# Altium PCB ThreadModule.PcbDoc (part 2 of 2)
Units mm, origin at the board's own origin, x right, y up, seen from the top; angles counter-clockwise.
Board outline 40 x 67.5 mm, 4 copper layers (SIG1, PLANE1, SIG3, SIG4), stack 1.58 mm thick; 114 components, 89 nets, 388 pads, 426 vias.
Unrouted connection lines stored in the file: 2.
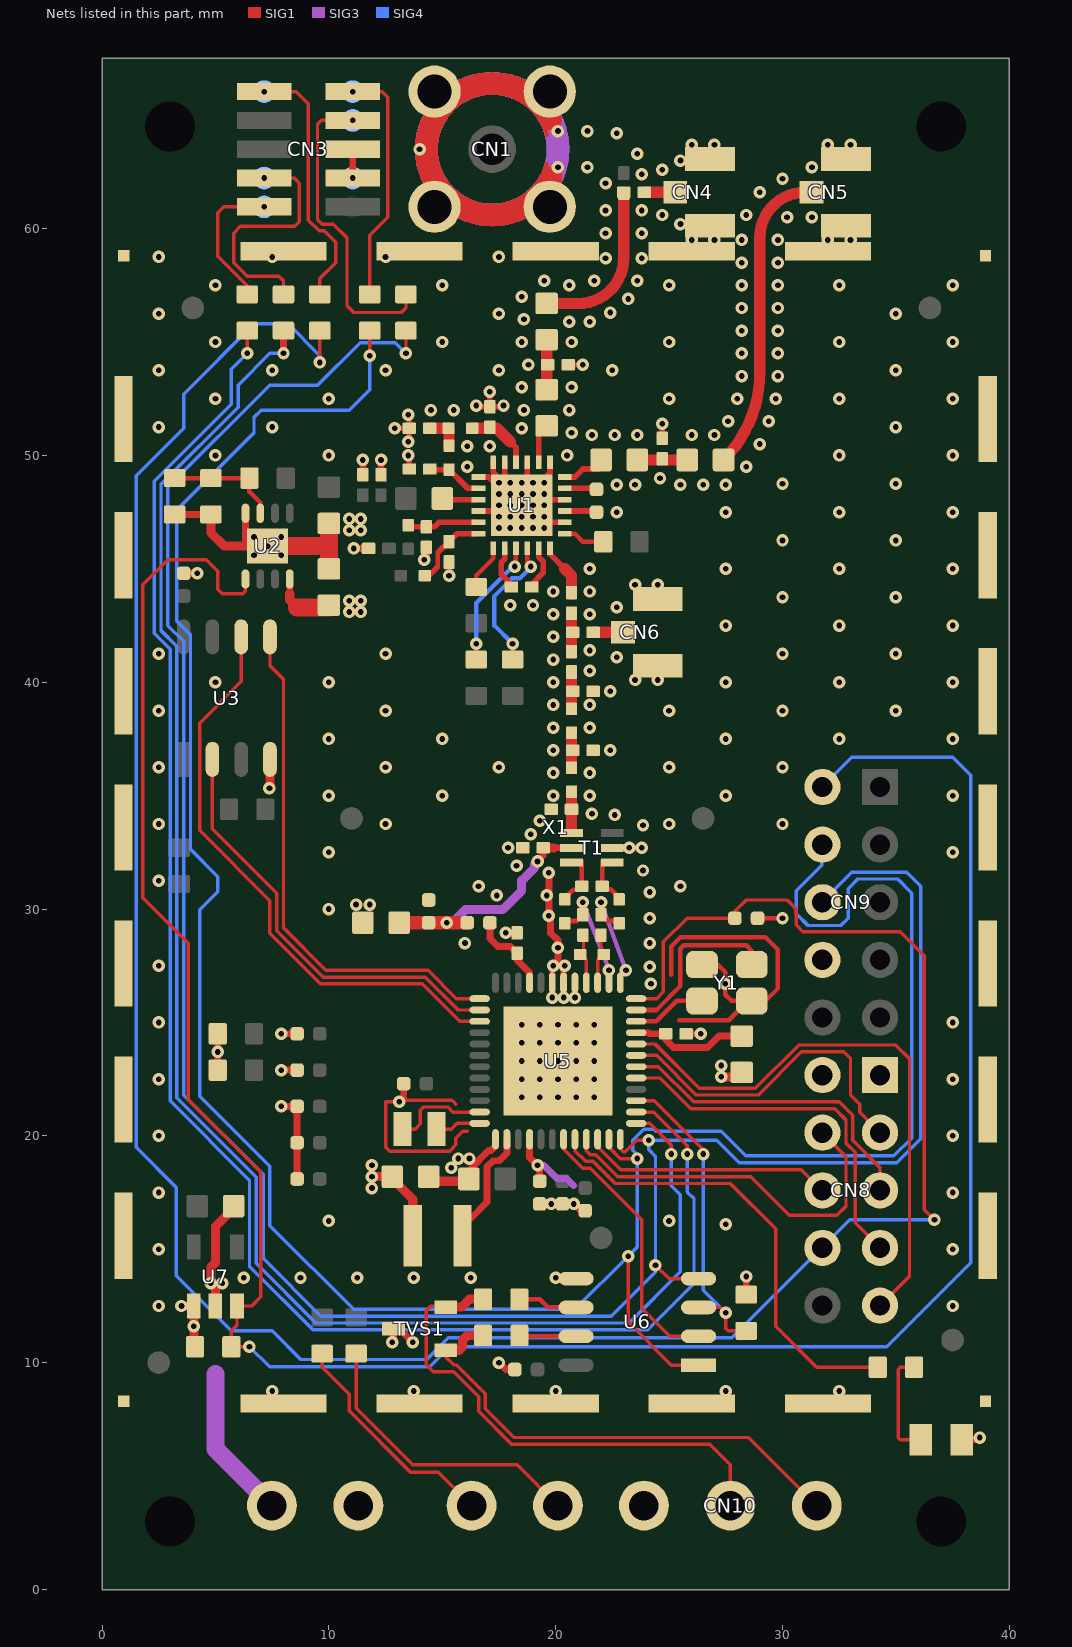
[diagram p4: the nets of this part, all layers, seen from the top]

## Via types
v1: diameter 0.55, hole 0.25, SIG1 to SIG4, 426 vias

## Nets (pads, with @x,y where several pads share a name; then routed paths per layer and width w, separated by ;. In a path a pad name is that pad's centre, name@x,y a point inside that pad or via, vN(x,y) a via of type N, cw(c..) or ccw(c..) an arc to the next point about the centre after c; other vN are vias at no path point) (continued)
GND: C3.1 C4.2 C5.2 C6.1 C7.2 C8.1 C9.1 C10.2 C11.1 C12.1 C13.2 C14.1 C15.2 C20.2 C21.2 C23.2 C24.1 C25.1 C27.1 C31.1 C33.1 C34.1 C35.1 C36.2 C37.1 C38.1 C39.2 C40.1 C42.1 C43.2 C44.2 C45.2 C46.2 C47.2 CN1.1 CN1.2 CN1.3 CN1.4 CN2.2L CN3.3 CN3.5 CN4.2 CN4.3 CN5.2 CN5.3 CN6.2 CN6.3 CN8.1 CN9.8 CN10.1L LED1.2 R2.1 R11.2 R13.2 R14.1 R21.1 T1.5 TP7.1 TVS1.3 U1.0 U1.8 U1.10 U1.13 U1.15 U1.17 U1.18 U1.19 U1.22 U2.0 U2.4 U3.4 U5.0 U5.17 U5.18 U5.19 U5.37 U6.5 U7.2 X1.1 Y1.2 Y1.4 | length 155.2
  SIG1 w0.15: 15.6,21.4 15.5,21.5 15.425,21.575 13.175,21.575 13.075,21.575 13,21.5 12.5,21.5 12.5,19.5 12.675,19.325 15.325,19.325 15.6,19.6 15.6,19.9 15.9,20.2 16.1,20.2
  SIG1 w0.2: 19.615,62.853 cw(c17.2,63.5) 19.615,64.147 ; 25.1,27.107 25.1,28.349 25.501,28.75 29.25,28.75 29.8,28.2 29.8,26.5 29.25,25.95 Y1.2@28.65,25.95 Y1.2@28.477,25.95 ; 25.45,25.1 27.627,25.1 Y1.2@28.477,25.95 ; Y1.4@26.45,27.55 27.15,27.55 27.477,27.223 v1(27.477,26.7) 27.477,26.223 27.75,25.95 Y1.2@28.477,25.95 ; C27.1@28.9,29.6 v1(30,29.6)
  SIG1 w0.25: v1(12.9,51.2) C5.2@13.55,51.2 ; v1(13.5,50) 13.55,49.95 C7.2@13.55,49.4 ; v1(13.5,50.6) 13.55,50.65 C5.2@13.55,51.2 ; v1(13.5,51.8) 13.55,51.75 C5.2@13.55,51.2 ; v1(16.5,52.2) 16.55,52.15 C4.2@17.1,52.15 ; U1.22@16.55,47.55 U1.0@17.4,47.55 ; U1.19@16.55,49.05 17.05,49.05 U1.0@17.2,48.9 ; v1(17.1,52.8) C4.2@17.1,52.15 ; U1.18@17.25,49.75 17.25,49.25 U1.0@17.4,49.1 ; v1(17.7,52.2) 17.65,52.15 C4.2@17.1,52.15 ; U1.0@17.75,48.9 U1.17@17.75,49.75 ; U1.0@18.75,48.9 U1.15@18.75,49.75 ; U1.0@19.6,47.05 U1.8@20.45,47.05 ; U1.0@19.6,48.05 U1.10@20.45,48.05 ; U1.0@19.6,49.1 19.75,49.25 U1.13@19.75,49.75 ; v1@19.848,26.248 U5.19@19.848,26.75 ; v1@20.348,26.148 U5.18@20.348,26.75 ; C3.1@20.55,54 v1(21.2,54) ; v1@20.848,26.177 U5.17@20.848,26.75 ; C6.1@24.7,50.75 v1(24.7,51.4)
  SIG1 w0.254: U5.19@19.85,26.75 19.85,27.4 v1@19.95,27.5 ; U5.18@20.35,26.75 v1@20.35,27.35
  SIG1 w0.3: R14.1@3.2,47.4 R2.1@4.8,47.4 ; C13.2@3.6,44.8 v1(4.2,44.8) ; R13.2@5.1,22.9 v1(5.1,23.7) R11.2@5.1,24.5 ; 6.325,46.3 U2.4@6.325,47.45 ; v1(7.9,21.3) C37.1@8.6,21.3 C38.1@8.6,19.7 C40.1@8.6,18.1 ; v1(7.9,22.9) C35.1@8.6,22.9 ; v1(7.9,24.5) C33.1@8.6,24.5 ; v1(11.05,62.23) CN3.5@11.05,63.5 ; v1(11.1,45.9) C14.1@11.75,45.9 ; C8.1@11.5,49.15 v1(11.5,49.8) ; C9.1@12.3,49.15 v1(12.3,49.8) ; v1(12.8,10.9) 12.85,10.95 TVS1.3@12.85,11.5 13.1,11.5 v1(13.7,10.9) ; v1(13.1,21.5) 13.175,21.575 13.3,21.7 C36.2@13.3,22.3 ; v1(14.2,45.4) 14.3,45.5 C11.1@14.3,45.95 ; v1(15.3,44.7) C12.1@15.3,45.3 ; C45.2@16.2,18 16.2,18.505 17.045,19.35 17.15,19.35 17.35,19.55 U5.37@17.35,19.85 ; v1(17.5,10) 17.8,9.7 C47.2@18.2,9.7 ; v1(17.8,28.95) C31.1@18.3,28.95 ; C42.1@19.3,17 v1(19.8,17) C43.2@20.3,17 v1(20.8,17) 21.1,16.7 C44.2@21.3,16.7 ; T1.5@22.5,32.7 v1(23.8,32.7) ; C34.1@25.75,24.5 v1(26.4,24.5) ; R21.1@28.4,13 v1(28.4,13.8) ; LED1.2@37.9,6.6 38.6,6.6 v1(38.7,6.7)
  SIG1 w0.305: v1@19.678,29.578 v1@19.7,29.557 ; v1@19.7,29.6 v1@19.7,29.557 ; v1@19.7,30.528 19.628,30.6 v1(19.6,30.6) ; v1(19.7,31.6) 19.7,30.7 v1(19.6,30.6) ; v1@20.1,27.65 v1(20.1,28.3) 20.1,28.625 19.775,28.95 19.775,29.603 v1@19.7,29.678 ; v1(19.6,30.6) 19.7,30.5 v1@19.7,29.678 ; v1@19.7,29.557 19.7,29.578 19.65,29.628 v1@19.7,29.678
  SIG1 w0.4: v1(4.8,13.5) 4.8,14.2 5,14.4 5,16 C46.2@5.9,16.9 ; R2.1@4.8,47.4 4.8,46.6 5.4,46 v1(7.3,46) ; U7.2@5,12.5 5,13.2 ; v1(7.38,35.331) 7.405,35.356 U3.4@7.405,36.6 ; C39.2@14.5,18.2 14.7,18 C45.2@16.2,18
  SIG1 w0.8: v1(7.3,46) 10,46 ; C15.2@10,45.1 10,46 ; C10.2@10,46.9 10,46
  SIG1 w1: 19.784,64.817 ccw(c17.2,63.5) 19.81,62.237
  SIG3 w1: 20.1,63.5 ccw(c17.2,63.5) 20.1,63.5
  SIG4 w1: 20.1,63.5 ccw(c17.2,63.5) 20.1,63.5
  other v1: 7.5,8.75 13.75,8.75 20,8.75 27.5,8.75 32.5,8.75 2.5,12.5 37.5,12.5 5.3,13.5 6.25,13.75 8.75,13.75 11.25,13.75 13.75,13.75 16.25,13.75 20,13.75 2.5,15 37.5,15 27.5,16.1 10,16.25 25,16.25 2.5,17.5 37.5,17.5 15.4,18.6 15.7,19 16.2,19 2.5,20 37.5,20 18.5,21.7 19.3,21.7 20.1,21.7 20.9,21.7 21.7,21.7 2.5,22.5 18.5,22.5 19.3,22.5 20.1,22.5 20.9,22.5 21.7,22.5 37.5,22.5 18.5,23.3 19.3,23.3 20.1,23.3 20.9,23.3 21.7,23.3 18.5,24.1 19.3,24.1 20.1,24.1 20.9,24.1 21.7,24.1 18.5,24.9 19.3,24.9 20.1,24.9 20.9,24.9 21.7,24.9 2.5,25 37.5,25 19.85,26.1 20.35,26.1 20.85,26.1 24.2,26.7 24.15,27.45 2.5,27.5 19.9,27.5 20.4,27.5 16,28.5 24.15,28.5 24.15,29.6 19.7,29.7 10,30 17.4,30.6 24.15,30.75 16.6,31 25.5,31 2.5,31.25 23.85,31.7 18.275,31.91 10,32.5 37.5,32.5 17.9,32.7 23.25,32.7 18.9,33.3 23.85,33.7 2.5,33.75 12.5,33.75 25,33.75 30,33.75 19.3,33.9 22.6,34.15 21.6,34.2 10,35 15,35 19.9,35 21.5,35 27.5,35 37.5,35 19.9,36 21.5,36 2.5,36.25 12.5,36.25 17.5,36.25 25,36.25 30,36.25 19.9,37 22.4,37 10,37.5 15,37.5 27.5,37.5 32.5,37.5 37.5,37.5 19.9,38 21.5,38 2.5,38.75 12.5,38.75 25,38.75 30,38.75 35,38.75 19.9,39 21.5,39 22.4,39.6 5,40 10,40 19.9,40 27.5,40 32.5,40 37.5,40 23.5,40.1 24.5,40.1 21.5,40.5 19.9,41 22.7,41.1 2.5,41.25 12.5,41.25 30,41.25 35,41.25 21.5,41.4 19.9,42 27.5,42.5 32.5,42.5 37.5,42.5 19.9,43 21.5,43 22.7,43.3 18,43.4 19,43.4 30,43.75 35,43.75 19.9,44 21.5,44 23.5,44.3 24.5,44.3 21.5,45 27.5,45 32.5,45 37.5,45 6.7,45.6 7.9,45.6 30,46.25 35,46.25 6.7,46.4 7.9,46.4 10.9,46.7 11.4,46.7 17.5,46.8 18,46.8 18.5,46.8 19,46.8 19.5,46.8 10.9,47.2 11.4,47.2 17.5,47.3 18,47.3 18.5,47.3 19,47.3 19.5,47.3 22.7,47.5 27.5,47.5 32.5,47.5 37.5,47.5 17.5,47.8 18,47.8 18.5,47.8 19,47.8 19.5,47.8 17.5,48.3 18,48.3 18.5,48.3 19,48.3 19.5,48.3 22.7,48.7 23.5,48.7 25.5,48.7 26.5,48.7 27.5,48.7 30,48.75 35,48.75 17.5,48.8 18,48.8 18.5,48.8 19,48.8 19.5,48.8 24.6,49 16.1,49.5 28.4,49.5 5,50 10,50 20.5,50 32.5,50 37.5,50 16.1,50.4 17.1,50.4 29,50.5 21.6,50.9 22.6,50.9 23.6,50.9 26,50.9 27,50.9 20.7,51 18.5,51.2 2.5,51.25 7.5,51.25 35,51.25 27.6,51.5 29.4,51.5 14.5,52 15.5,52 18.6,52 20.6,52 5,52.5 10,52.5 25,52.5 28,52.5 29.7,52.5 32.5,52.5 37.5,52.5 18.5,53 20.7,53 28.2,53.5 29.8,53.5 2.5,53.75 7.5,53.75 12.5,53.75 17.5,53.75 22.5,53.75 35,53.75 18.8,54 28.2,54.5 29.8,54.5 5,55 15,55 18.5,55 20.7,55 25,55 32.5,55 37.5,55 28.2,55.5 29.8,55.5 20.6,55.9 21.5,55.9 18.6,56 2.5,56.25 17.5,56.25 35,56.25 22.4,56.3 28.2,56.5 29.8,56.5 23.2,56.9 18.5,57 5,57.5 15,57.5 20.6,57.5 25,57.5 28.2,57.5 29.8,57.5 32.5,57.5 37.5,57.5 19.5,57.7 21.7,57.7 23.6,57.7 28.2,58.5 29.8,58.5 22.2,58.7 23.8,58.7 2.5,58.75 7.5,58.75 12.5,58.75 17.5,58.75 26,59.5 27,59.5 28.2,59.5 29.8,59.5 32,59.5 33,59.5 22.2,59.8 23.8,59.8 25.5,60.2 30.2,60.5 31.3,60.5 24.7,60.6 28.4,60.6 22.2,60.8 23.8,60.8 29,61.6 22.2,62 30,62.2 23.8,62.4 24.7,62.6 20.1,62.7 21.4,62.7 31.3,62.7 25.5,63 23.6,63.3 14,63.5 26,63.7 27,63.7 32,63.7 33,63.7 22.7,64.2 20.1,64.3 21.4,64.3
GPIO0: CN8.4 U5.45 | length 17
  SIG1 w0.15: U5.45@21.35,19.85 21.35,19.35 21.525,19.175 21.77,19.175 22.745,18.2 28.6,18.2 30.3,16.5 32.4,16.5 32.8,16.9 32.8,19.07 31.73,20.14 CN8.4@31.76,20.14
GPIO1: CN8.6 U5.46 | length 11
  SIG1 w0.15: U5.46@21.85,19.85 21.85,19.52 22.87,18.5 30.83,18.5 CN8.6@31.73,17.6
IN0: CN11.1L R9.1 | length 10.1
  SIG1 w0.15: R9.1@9.7,10.4 9.7,9.8 10.9,8.6 10.9,7.876 13.6,5.176 14.814,5.176 CN11.1L@16.29,3.7
IN1: CN11.2L R39.1 | length 13.1
  SIG1 w0.15: R39.1@11.2,10.4 11.2,8 13.7,5.5 18.3,5.5 CN11.2L@20.1,3.7
LED: R30.1 U5.44 | length 20.3
  SIG1 w0.15: U5.44@20.85,19.85 20.85,19.35 21.325,18.875 21.646,18.875 22.621,17.9 27.7,17.9 29.7,15.9 29.7,11.6 31.5,9.8 R30.1@34.2,9.8
LFXTAL_N: U5.35 Y2.2 | length 4.2
  SIG1 w0.15: Y2.2@13.25,20.3 13.8,20.3 14.038,20.538 14.038,21.138 14.175,21.275 15.243,21.275 15.468,21.05 U5.35@16.65,21.05
LFXTAL_P: U5.36 Y2.1 | length 2
  SIG1 w0.15: Y2.1@14.75,20.3 15.4,20.3 15.65,20.55 U5.36@16.65,20.55
MISO: U3.2 U5.26 | length 19.1
  SIG1 w0.15: U3.2@4.865,36.6 4.865,33.535 7.7,30.7 7.7,29.049 9.749,27 14.249,27 15.699,25.55 U5.26@16.65,25.55
MOSI: U3.5 U5.25 | length 23
  SIG1 w0.15: U3.5@7.405,42 7.405,40.72 8,40.125 8,29.173 9.873,27.3 14.373,27.3 15.623,26.05 U5.25@16.65,26.05
NCP_CTS: CN8.3 U5.7 | length 15.2
  SIG1 w0.15: U5.7@23.55,23.55 24.454,23.55 26.204,21.8 28.932,21.8 30.837,23.705 32.695,23.705 33,23.4 33,21.8 33.4,21.4 33.4,21.04 CN8.3@34.3,20.14 CN8.3@34.3,20.5
NCP_PWR: CN9.2 R8.1 U2.5 U7.3 | length 107.1
  SIG1 w0.15: U2.5@6.325,44.55 6.325,44.025 6.2,43.9 5.3,43.9 5.1,44.1 5.1,44.9 4.6,45.4 2.9,45.4 1.8,44.3 1.8,30.5 3.8,28.5 3.8,21.6 7,18.4 7,12.9 6.6,12.5 U7.3@5.95,12.5 5.95,11.65 5.7,11.4 R8.1@5.7,10.7 v1(6.5,10.7)
  SIG4 w0.15: v1(6.5,10.7) 7.385,9.815 14.444,9.815 15.329,10.7 34.6,10.7 38.3,14.4 38.3,35.9 37.5,36.7 33.05,36.7 CN9.2@31.73,35.38
NCP_RTS: CN8.9 U5.8 | length 25.3
  SIG1 w0.15: U5.8@23.55,24.05 24.378,24.05 26.328,22.1 28.808,22.1 30.713,24.005 35,24.005 35.6,23.405 35.6,13.82 CN8.9@34.3,12.52
NCP_RX: CN8.5 U5.6 | length 14.2
  SIG1 w0.15: U5.6@23.55,23.05 24.53,23.05 26.08,21.5 32.5,21.5 33.1,20.9 33.1,19.8 34.3,18.6 CN8.5@34.3,17.6
NCP_TX: CN8.7 U5.5 | length 16.3
  SIG1 w0.15: U5.5@23.55,22.55 24.605,22.55 25.956,21.2 32.3,21.2 32.8,20.7 32.8,19.676 33.2,19.276 33.2,16.16 CN8.7@34.3,15.06
NetC2_2: C2.2 CN4.1 | length 1.4
  SIG1 w0.5: C2.2@23.9,61.6 CN4.1@25.275,61.6
NetC11_2: C11.2 L8.1 U1.23 | length 3.3
  SIG1 w0.25: L8.1@13.4,46.925 13.475,46.85 C11.2@14.3,46.85 14.65,46.85 14.85,47.05 U1.23@16.55,47.05
NetC12_2: C12.2 L9.1 U1.24 | length 3.5
  SIG1 w0.2: 14.787,45.063 14.8,45.075 14.8,45.7 14.83,45.73
  SIG1 w0.25: L9.1@14.225,44.7 14.413,44.7 14.775,45.063 ; 14.769,45.069 14.775,45.075 ; 14.825,45.735 15.29,46.2 C12.2@15.3,46.2 15.65,46.55 U1.24@16.55,46.55
NetC17_1: C17.1 U1.6 | length 2.3
  SIG1 w0.2: U1.6@19.75,45.65 U1.6@19.75,45.85
  SIG1 w0.25: U1.6@19.75,45.65 20.4,45
  SIG1 w0.5: 20.4,45 20.7,44.7 C17.1@20.7,43.9
NetL7_1: L7.1 U1.21 | length 1.6
  SIG1 w0.25: L7.1@15,48.1 15.05,48.05 U1.21@16.55,48.05
NetLED1_1: LED1.1 R30.2 | length 4.8
  SIG1 w0.15: R30.2@35.8,9.8 35.2,9.8 35.1,9.7 35.1,6.7 35.2,6.6 LED1.1@36.1,6.6
NetR1_1: R1.1 R2.2 R14.2 U2.3 | length 5
  SIG1 w0.2: R14.2@3.2,49 R2.2@4.8,49 ; R2.2@4.8,49 R1.1@6.5,49 6.5,48.4 6.975,47.925 U2.3@6.975,47.45
NetR4_1: R4.1 U1.7 | length 1.8
  SIG1 w0.2: U1.7@20.45,46.55 20.85,46.55 21.2,46.2 R4.1@22.1,46.2
NetR5_1: R5.1 U1.1 | length 2
  SIG1 w0.2: R5.1@16.5,44.2 16.5,44.708 17.25,45.458 U1.1@17.25,45.85
NetR6_1: R6.1 U1.3 | length 5.7
  SIG1 w0.2: R6.1@16.5,41 v1(16.5,41.7) ; v1(18.2,45.1) 18.25,45.05 U1.3@18.25,45.85
  SIG4 w0.2: v1(16.5,41.7) 16.5,43.495 18.105,45.1 v1(18.2,45.1)
NetR7_1: R7.1 U1.4 | length 5.9
  SIG1 w0.2: R7.1@18.1,41 v1(18.1,41.7) ; v1@18.75,45.197 U1.4@18.75,45.85
  SIG4 w0.2: v1(18.1,41.7) 17.3,42.5 17.3,43.8 18.075,44.575 18.417,44.575 18.9,45.058 v1(18.9,45.1)
NRESET: C27.2 CN8.8 R17.2 U5.12 | length 116.8
  SIG1 w0.15: v1(9.6,54.1) R17.2@9.6,55.5 ; U5.12@23.55,26.05 24.45,26.05 24.75,26.35 24.75,28.55 25.8,29.6 C27.2@27.9,29.6 27.9,29.9 28.4,30.4 30.2,30.4 30.6,30 30.6,29.3 30.9,29 35.2,29 36.25,27.95 36.25,16.75 v1(36.7,16.3)
  SIG4 w0.15: v1(9.6,54.1) 9.6,54.4 8.2,55.8 6.7,55.8 3.6,52.7 3.6,51.2 1.5,49.1 1.5,19.5 3.275,17.725 3.275,13.825 5.7,11.4 7.5,11.4 8.76,10.14 14.31,10.14 15.269,11.1 27.77,11.1 32.97,16.3 v1(36.7,16.3)
nRESET_CN: CN3.10 R17.1 TP3.1 | length 11.5
  SIG1 w0.15: v1(7.15,66.04) 8.56,66.04 9.1,65.5 9.1,60.376 9.576,59.9 9.8,59.9 10.3,59.4 10.3,58.5 9.6,57.8 R17.1@9.6,57.1
PAVDD: C24.2 C25.2 FB1.2 R12.1 T1.2 | length 10.4
  SIG1 w0.3: v1(19.2,32.1) 19.45,32.35 C24.2@19.45,32.7 ; 19.9,32.7 T1.2@20.7,32.7
  SIG1 w0.4: C24.2@19.45,32.7 19.9,32.7
  SIG1 w0.6: FB1.2@13.1,29.4 v1(15.2,29.4) R12.1@16.1,29.4
  SIG3 w0.4: v1(15.2,29.4) 15.45,29.4 16.025,29.975 17.659,29.975 18.5,30.816 18.5,31.251 18.524,31.275 19.075,31.826 19.075,31.975 v1(19.2,32.1)
PAVDD24: C31.2 R12.2 U5.21 | length 3.7
  SIG1 w0.3: R12.2@17.1,29.4 17.1,28.7 17.45,28.35 18,28.35 C31.2@18.3,28.05 18.3,27.75 18.85,27.2 U5.21@18.85,26.75
RF1: C23.1 L11.1 T1.1 | length 1.7
  SIG1 w0.5: T1.1@20.7,33.5 L11.1@20.7,35.175
RF2: C21.1 L10.1 L11.2 | length 1.5
  SIG1 w0.5: L11.2@20.7,36.225 L10.1@20.7,37.775
RF3: C19.1 C20.1 L10.2 | length 1.6
  SIG1 w0.5: L10.2@20.7,38.825 C19.1@20.7,40.45
RF4: C17.2 C18.2 C19.2 | length 1.7
  SIG1 w0.5: C19.2@20.7,41.35 C17.2@20.7,43.05
RF5: C18.1 CN6.1 | length 1.3
  SIG1 w0.5: 21.65,42.2 CN6.1@22.975,42.2
RF_ANT1: C1.2 C2.1 L1.2 | length 7.4
  SIG1 w0.5: L1.2@19.6,56.7 21,56.7 ccw(c21,58.7) 23,58.7 C2.1@23,61.6
RF_ANT1_1: C3.2 L1.1 L2.2 | length 2.2
  SIG1 w0.5: L2.2@19.6,52.9 L1.1@19.6,55.1
RF_ANT1_2: L2.1 U1.14 | length 1.7
  SIG1 w0.25: U1.14@19.25,49.75 19.25,50.95 L2.1@19.6,51.3
RF_ANT2: CN5.1 L6.2 | length 13.6
  SIG1 w0.5: L6.2@27.4,49.8 ccw(c23.537,53.663) 29,53.663 29,59.6 cw(c31,59.6) 31,61.6 CN5.1@31.275,61.6
RF_ANT2_1: C6.2 L5.2 L6.1 | length 2.2
  SIG1 w0.5: L5.2@23.6,49.8 L6.1@25.8,49.8
RF_ANT2_2: L5.1 U1.12 | length 1.6
  SIG1 w0.25: U1.12@20.45,49.05 20.85,49.05 21.2,49.4 L5.1@21.9,49.4
RF_LNA1: R3.1 U1.11 | length 1.4
  SIG1 w0.25: U1.11@20.45,48.55 21.75,48.55 R3.1@21.8,48.5
RF_LNA2: R3.2 U1.9 | length 1.4
  SIG1 w0.25: U1.9@20.45,47.55 21.75,47.55 R3.2@21.8,47.5
RF_PA1: C16.2 U1.5 | length 1.9
  SIG1 w0.25: C16.2@18.95,44.2 18.95,44.334 19.45,44.834 19.45,45.328 19.25,45.528 U1.5@19.25,45.85
RF_PA2: C16.1 U1.2 | length 1.9
  SIG1 w0.25: U1.2@17.75,45.85 17.75,45.428 17.6,45.278 17.6,44.75 C16.1@18.15,44.2
RF_PA3: C7.1 L4.1 U1.20 | length 2.5
  SIG1 w0.25: C7.1@14.45,49.4 14.475,49.375 L4.1@15.3,49.375 16.125,48.55 U1.20@16.55,48.55
RF_PA4: C5.1 L3.2 L4.2 | length 1.6
  SIG1 w0.5: C5.1@14.45,51.2 L3.2@15.275,51.2 15.3,51.175 L4.2@15.3,50.425
RF_PA5: C4.1 L3.1 U1.16 | length 2.9
  SIG1 w0.25: 18,50.6 18.25,50.35 U1.16@18.25,49.75
  SIG1 w0.5: L3.1@16.325,51.2 17.4,51.2 18,50.6
RFDIFF_N: C26.2 L12.2 T1.3 | length 2
  SIG1 w0.203: L12.2@20.45,30.525 20.775,30.85 21,30.85 C26.2@21.15,31 T1.3@21.15,32.1
RFDIFF_P: C26.1 L13.2 T1.4 | length 2
  SIG1 w0.203: T1.4@22.05,32.1 C26.1@22.05,31 22.175,30.875 22.425,30.875 22.75,30.55 L13.2@22.75,30.525
RFI_N: C29.2 L15.1 U5.16 | length 2.1
  SIG1 w0.15: L15.1@21.077,28.05 21.352,27.775 U5.16@21.35,26.75 ; L15.1@21.225,28.1 C29.2@21.225,28.775
RFI_P: C30.2 L15.2 U5.15 | length 2
  SIG1 w0.15: U5.15@21.852,26.75 21.852,27.775 L15.2@22.127,28.05 ; L15.2@22,28.175 C30.2@22,28.775
RFO_N: C29.1 L12.1 U5.14 | length 5.1
  SIG1 w0.203: L12.1@20.45,29.375 20.55,29.475 20.925,29.475 C29.1@21.2,29.75 v1(21.2,30.3) ; U5.14@22.348,26.852 v1(22.35,27.3)
  SIG3 w0.203: v1(21.2,30.3) v1@22.348,27.339
RFO_P: C30.1 L13.1 U5.13 | length 5.3
  SIG1 w0.203: v1(22,30.3) C30.1@22,29.75 22.275,29.475 22.65,29.475 L13.1@22.75,29.375 ; U5.13@22.85,26.75 22.85,27.05 v1(23.1,27.3)
  SIG3 w0.203: v1(22,30.3) v1(23.1,27.3)
RS485_A: CN10.2L R38.1 TVS1.2 | length 22.6
  SIG1 w0.15: TVS1.2@15.15,12.45 15.1,12.5 14.5,12.5 14.3,12.3 14.3,9.9 14.6,9.6 15.5,9.6 16.6,8.5 16.6,7.851 18.051,6.4 26.8,6.4 27.7,5.5 CN10.2L@27.7,3.7
  SIG1 w0.4: TVS1.2@15.15,12.45 15.85,12.45 16.2,12.8 R38.1@16.8,12.8
RS485_B: CN10.3L R37.1 TVS1.1 | length 21.8
  SIG1 w0.15: TVS1.1@15.15,10.55 15.15,10.25 15.5,9.9 15.624,9.9 16.9,8.624 16.9,7.976 18.176,6.7 28.51,6.7 CN10.3L@31.51,3.7
  SIG1 w0.4: TVS1.1@15.15,10.55 15.75,10.55 15.9,10.7 15.9,11 16.1,11.2 R37.1@16.8,11.2
RS485_DE: R21.2 U5.3 U6.3 | length 14.4
  SIG1 w0.15: U5.3@23.55,21.55 24.343,21.55 26.5,19.393 v1(26.5,19.2) ; U6.3@26.3,12.435 27.265,12.435 v1(27.5,12.2) 27.5,11.5 27.6,11.4 R21.2@28.4,11.4
  SIG4 w0.15: v1(26.5,19.2) 26.5,13.2 v1(27.5,12.2)
RS485_N: R37.2 U6.7 | length 2.5
  SIG1 w0.2: R37.2@18.4,11.2 18.435,11.165 U6.7@20.9,11.165
RS485_nRE: U5.43 U6.2 | length 12.1
  SIG1 w0.15: U5.43@20.35,19.85 20.35,19.412 21.187,18.575 21.522,18.575 23.8,16.297 23.8,12.4 25.035,11.165 U6.2@26.3,11.165
RS485_P: R38.2 U6.6 | length 2.7
  SIG1 w0.2: R38.2@18.4,12.8 19.3,12.8 19.665,12.435 U6.6@20.9,12.435
SCK: U3.6 U5.27 | length 26
  SIG1 w0.15: U3.6@6.135,42 6.135,40.035 4.3,38.2 4.3,33.473 7.4,30.373 7.4,28.924 9.624,26.7 14.124,26.7 15.774,25.05 U5.27@16.65,25.05
SWCLK: R16.2 U5.1 | length 73.9
  SIG1 w0.15: U5.1@23.55,20.55 24.148,20.55 25.1,19.598 v1(25.1,19.2)
  SIG1 w0.3: v1(8,54.5) R16.2@8,55.5
  SIG4 w0.15: v1(8,54.5) 7.4,54.5 6,53.1 6,52.131 2.6,48.731 2.6,42.281 3.3,41.581 3.3,21.676 6.8,18.176 6.8,14.376 9.426,11.75 23.25,11.75 25.5,14 25.5,17.4 25.1,17.8 v1(25.1,19.2)
SWDCLK_CN: CN3.4 R16.1 TP2.1 | length 10.9
  SIG1 w0.15: v1(7.15,62.23) 8.47,62.23 8.7,62 8.7,60.3 8.5,60.1 6.1,60.1 5.8,59.8 5.8,58.5 6.4,57.9 7.8,57.9 8,57.7 R16.1@8,57.1
SWDIO: R15.2 U5.2 | length 75.4
  SIG1 w0.15: v1(6.4,54.5) R15.2@6.4,55.5 ; U5.2@23.55,21.05 24.322,21.05 25.8,19.572 v1(25.8,19.2)
  SIG4 w0.15: v1(6.4,54.5) 5.7,53.8 5.7,52.256 2.3,48.856 2.3,42.157 3,41.457 3,21.551 6.5,18.051 6.5,14.251 9.301,11.45 24.05,11.45 26.1,13.5 26.1,17.224 25.8,17.524 v1(25.8,19.2)
SWDIO_CN: CN3.2 R15.1 TP1.1 | length 6.3
  SIG1 w0.15: R15.1@6.4,57.1 6.4,57.476 5.1,58.776 5.1,60.7 5.36,60.96 v1(7.15,60.96)
UART_RX: CN9.4 R18.2 U5.47 U6.1 | length 114.6
  SIG1 w0.15: v1(11.8,54.4) R18.2@11.8,55.5 ; U5.47@22.35,19.85 22.35,19.507 22.857,19 v1@23.528,19 ; v1(23.2,14.7) 23.2,11.8 25.105,9.895 U6.1@26.3,9.895
  SIG4 w0.15: v1(11.8,54.4) 11.8,52.9 10.9,52 7.024,52 6.7,51.676 6.7,50.993 3.3,47.593 3.3,42.7 3.9,42.1 3.9,32.631 5.1,31.431 5.1,30.769 4.3,29.969 4.3,21.755 7.4,18.655 7.4,16.044 11.094,12.35 20.85,12.35 v1(23.2,14.7) 23.6,15.1 v1(23.6,19) 23.6,19.175 23.4,19.375 23.4,19.807 23.893,20.3 24.307,20.3 24.407,20.2 27.3,20.2 28.385,19.115 34.915,19.115 35.7,19.9 35.7,30.7 35.075,31.325 33.325,31.325 32.9,30.9 32.9,29.6 32.575,29.275 31.125,29.275 30.6,29.8 30.6,30.8 31.73,31.93 CN9.4@31.73,32.84
UART_RX_CN: CN3.9 R18.1 TP4.1 | length 10.7
  SIG1 w0.15: v1(11.05,66.04) 12.36,66.04 12.6,65.8 12.6,60.5 11.8,59.7 R18.1@11.8,57.1
UART_TX: CN9.6 R19.2 U5.48 U6.4 | length 108.4
  SIG1 w0.15: v1(13.4,54.5) R19.2@13.4,55.5 ; U5.48@22.85,19.85 22.85,19.431 22.981,19.3 23.077,19.3 23.577,19.8 v1(24.1,19.8) ; v1(24.4,14.3) 25,13.7 25.005,13.705 U6.4@26.3,13.705
  SIG4 w0.15: v1(13.4,54.5) 12.925,54.975 11.375,54.975 9.5,53.1 7.393,53.1 2.9,48.607 2.9,42.5 3.6,41.8 3.6,21.8 7.1,18.3 7.1,14.6 9.65,12.05 22.457,12.05 24.4,13.993 v1(24.4,14.3) 24.4,19.1 24.1,19.4 v1(24.1,19.8) 27.1,19.8 28.085,18.815 35.039,18.815 36.1,19.876 36.1,31 35.475,31.625 33.055,31.625 CN9.6@31.73,30.3
UART_TX_CN: CN3.7 R19.1 TP5.1 | length 13.9
  SIG1 w0.15: v1(11.05,64.77) 9.67,64.77 9.5,64.6 9.5,60.4 9.7,60.2 10.2,60.2 10.8,59.6 10.8,56.6 11.1,56.3 13.2,56.3 13.4,56.5 R19.1@13.4,57.1
VDCDC: C39.1 C42.2 FB1.1 FB2.2 L16.2 U5.40 | length 8.8
  SIG1 w0.3: U5.40@18.85,19.85 18.85,19.05 v1(19.2,18.7) 19.3,18.6 C42.2@19.3,18
  SIG1 w0.4: v1(11.9,18.2) 12.7,18.2 13.7,17.2 L16.2@13.7,15.6 ; v1(27.3,22.6) 28,22.6 FB2.2@28.2,22.8
  SIG3 w0.3: v1(19.2,18.7) 19.487,18.7 20.062,18.125 20.475,18.125 20.8,17.8
  other v1: 11.9,17.7 11.9,18.7 27.3,23.1 11.2,30.2 11.8,30.2
VDDRF: C34.2 FB2.1 U5.9 | length 5.3
  SIG1 w0.3: U5.9@23.55,24.55 24.072,24.55 24.122,24.5 C34.2@24.85,24.5 24.85,24.25 25.2,23.9 26.7,23.9 27.2,24.4 FB2.1@28.2,24.4
VIN: C15.1 CN2.1L CN8.2 R8.2 U2.8 U7.1 | length 12
  SIG1 w0.3: 8.275,43.9 U2.8@8.275,44.55
  SIG1 w0.4: v1(3.5,12.5) U7.1@4.05,12.5 v1(4.05,11.6) 4.05,10.75 R8.2@4.1,10.7 ; 8.275,43.9 8.275,43.625 8.6,43.3
  SIG1 w0.8: 8.6,43.3 C15.1@10,43.3
  SIG3 w0.8: 5,9.5 5,6.19 CN2.1L@7.49,3.7
  other v1: 10.9,43.1 11.4,43.1 10.9,43.6 11.4,43.6
VREGSW: L16.1 U5.38 | length 5.4
  SIG1 w0.3: L16.1@15.9,15.6 15.9,16.4 16.3,16.4 16.975,17.075 16.975,18.644 17.231,18.9 17.5,18.9 17.85,19.25 U5.38@17.85,19.85
XIN: U5.10 Y1.1 | length 3.3
  SIG1 w0.2: U5.10@23.55,25.05 24.44,25.05 25.34,25.95 Y1.1@26.45,25.95
XOUT: U5.11 Y1.3 | length 7.9
  SIG1 w0.2: U5.11@23.55,25.55 24.445,25.55 25.5,26.605 25.5,28.254 25.646,28.4 28.4,28.4 28.65,28.15 Y1.3@28.65,27.55
pads on no net: CN3.6 CN3.8 T1.6 U2.2 U2.6 U2.7 U5.20 U7.4
copper on no net:
  other v1: 37.5,27.5 37.5,30

## Polygon pours and split planes (outlines as drawn)
GND on SIG3 "GND_L03_P020" (solid, remove dead copper, pour order 20): 0,0 0,67.5 40,67.5 40,0
+3.3V on SIG3 "+3.3V_L03_P002" (solid, remove dead copper, pour order 14): 31,28.3 27.4,28.3 24,24.9 24,22.9 21.5,20.5 15.9,20.5 15.9,22.9 13.3,22.9 13.3,20.1 16.4,17 19.6,17 26.5,23.9 28.3,23.9 28.3,19.25 26.75,19.25 22.3,14.8 13.6,14.8 7.6,20.8 7.6,41.2 3.5,41.2 3.5,15.5 7.2,11.8 18.3,11.8 31,11.8
VIN on SIG3 "+5V_L03_P016" (solid, pour order 16): 34.3,23.6 34.3,9 1,9 1,44 11.7,44 11.7,41.5 3.3,41.5 3.3,13.6 5.3,11.6 31.204,11.6 31.204,23.6
VDCDC on SIG3 "VDCDC_L03_P006" (solid, remove dead copper, pour order 12): 10.396,30.5 10.396,18.304 13.5,15.2 21.2,15.2 25.9,19.9 27.9,19.9 27.9,22.4 27.9,23.4 26.2,23.4 19.4,16.6 16.2,16.6 13.1,19.528 13.1,20.6 12.2,21.5 12.2,30.5
GND on SIG1 "GND_L01_P018" (solid, remove dead copper, pour order 18): 0,0 0,67.5 40,67.5 40,0
GND on SIG4 "GND_L04_P022" (solid, remove dead copper, pour order 22): 0,0 0,67.5 40,67.5 40,0
GND on PLANE1 (split plane): 39.798,0.202 0.202,0.202 0.202,67.298 39.798,67.298

## Keep-outs
SIG1:
  circle w0.15: c3,3 r2.5
  circle w0.15: c37,3 r2.5
  circle w0.15: c3,64.5 r2.5
  circle w0.15: c37,64.5 r2.5
  circle w0.1: c17.2,63.5 r2.1
SIG3:
  circle w0.1: c17.2,63.5 r2.1
SIG4:
  circle w0.15: c37,3 r2.5
  circle w0.15: c3,3 r2.5
  circle w0.15: c3,64.5 r2.5
  circle w0.15: c37,64.5 r2.5
  circle w0.1: c17.2,63.5 r2.1
Keep-Out Layer:
  the board outline again, w0.2

## Other copper
SIG1:
  region net GND: 10,47.5 10,46.4 11.7,46.4 11.7,47.5
  region net VIN: 10,43.9 10,42.8 11.7,42.8 11.7,43.9
  region net +3.3V: 4.6,18.6 3.55,18.6 3.55,16.6 4.6,16.6
  region net GND: 5.6,13.2 5.6,13.8 4.5,13.8 4.5,13.2
  rectangle net VDCDC: 10.9,28.9 12.1,30.5
  rectangle net VDCDC: 27.024,22.5 28.4,23.224
  rectangle net VDCDC: 11.6,17.4 12.2,19
  rectangle net +3.3V: 17.5,17.146 18.7,18.5
  rectangle net GND: 14.8,18 16.5,19.1
  rectangle net GND: 19.7,27.3 20.6,27.7
  pour cut-out: 2.5,9 cw(c2.5,10) 1.5,10 cw(c2.5,10) 2.5,11 cw(c2.5,10) 3.5,10 cw(c2.5,10)
  pour cut-out: 37.5,10 cw(c37.5,11) 36.5,11 cw(c37.5,11) 37.5,12 cw(c37.5,11) 38.5,11 cw(c37.5,11)
  pour cut-out: 22,14.5 cw(c22,15.5) 21,15.5 cw(c22,15.5) 22,16.5 cw(c22,15.5) 23,15.5 cw(c22,15.5)
  pour cut-out: 26.5,33 cw(c26.5,34) 25.5,34 cw(c26.5,34) 26.5,35 cw(c26.5,34) 27.5,34 cw(c26.5,34)
  pour cut-out: 11,33 cw(c11,34) 10,34 cw(c11,34) 11,35 cw(c11,34) 12,34 cw(c11,34)
  pour cut-out: 36.5,55.5 cw(c36.5,56.5) 35.5,56.5 cw(c36.5,56.5) 36.5,57.5 cw(c36.5,56.5) 37.5,56.5 cw(c36.5,56.5)
  pour cut-out: 4,55.5 cw(c4,56.5) 3,56.5 cw(c4,56.5) 4,57.5 cw(c4,56.5) 5,56.5 cw(c4,56.5)
  pour cut-out: 37.1,55.1 37.1,51.1 35.55,51.1 35.55,55.1
  pour cut-out: 16.7,52.675 17.5,52.675 17.5,50.875 16.7,50.875
  pour cut-out: 14.9,50.8 14.9,51.6 16.7,51.6 16.7,50.8
  pour cut-out: 13.025,50.8 13.025,51.6 14.825,51.6 14.825,50.8
  pour cut-out: 13.025,49 13.025,49.8 14.825,49.8 14.825,49
  pour cut-out: 15.7,49 14.9,49 14.9,50.8 15.7,50.8
  pour cut-out: 12.8,44.3 12.8,45.1 14.6,45.1 14.6,44.3
  pour cut-out: 14.9,46.725 15.7,46.725 15.7,44.925 14.9,44.925
  pour cut-out: 13.9,47.375 14.7,47.375 14.7,45.575 13.9,45.575
  pour cut-out: 13.1,47.3 13.9,47.3 13.9,45.5 13.1,45.5
  pour cut-out: 12.7,48.85 15.7,48.85 15.7,47.35 12.7,47.35
  pour cut-out: 28.1,49.05 25.1,49.05 25.1,50.55 28.1,50.55
  pour cut-out: 24.3,49.05 21.3,49.05 21.3,50.55 24.3,50.55
  pour cut-out: 16.9,49.4 16.9,46.2 20.1,46.2 20.1,49.4
  pour cut-out: 20.35,57.4 20.35,54.4 18.85,54.4 18.85,57.4
  pour cut-out: 20.35,53.6 20.35,50.6 18.85,50.6 18.85,53.6
  pour cut-out: 31.951,60.85 30.537,60.85 30.537,62.35 31.951,62.35
  pour cut-out: 33.861,62.59 33.861,60.61 31.75,60.61 31.75,62.59
  pour cut-out: 32.124,62.1 32.124,61.1 30.7,61.1 30.7,62.1
  pour cut-out: 26.124,62.1 26.124,61.1 23,61.1 23,62.1
  pour cut-out: 27.861,62.59 27.861,60.61 25.75,60.61 25.75,62.59
  pour cut-out: 25.951,60.85 24.537,60.85 24.537,62.35 25.951,62.35
  pour cut-out: 23.824,42.7 23.824,41.7 20.328,41.7 20.328,42.7
  pour cut-out: 25.561,43.19 25.561,41.21 23.45,41.21 23.45,43.19
  pour cut-out: 23.651,41.45 22.237,41.45 22.237,42.95 23.651,42.95
  pour cut-out: 22.533,31.823 22.533,29.843 20.423,29.843 20.423,31.823
  pour cut-out: 19.569,31.725 19.569,34.05 20.2,34.05 20.2,36.55 20.2,44.7 21.2,44.7 21.2,33.9 23.6,33.9 23.6,30.95 23.9,30.95 23.9,26.406 22.869,26.406 22.869,20.406 18.994,20.406 19.042,17.146 16.869,17.146 16.869,26.5 19.569,26.5
  pour cut-out: 25.6,25.3 25.6,28.2 29.4,28.2 29.4,26.873 27.827,25.3
  pour cut-out: 12.581,19.4 12.581,21.5 15.3,21.5 15.3,19.4
  pour cut-out: 17.5,63 17.5,64 19.7,64 19.7,63
  text "1" at 35.9,54.7 h0.7 r270
SIG3:
  pour cut-out: 20.498,26.414 20.498,28.639 ccw(c20.273,28.639) 20.273,28.864 cw(c20.273,29.114) 20.023,29.114 20.023,30.689 cw(c20.273,30.689) 20.273,30.939 23.623,30.939 cw(c23.623,30.664) 23.898,30.664 23.903,26.819 cw(c23.273,26.819) 23.273,26.189 20.723,26.189 cw(c20.723,26.414)
  pour cut-out: 37.1,55.1 37.1,51.1 35.55,51.1 35.55,55.1
  text "3" at 35.9,52.4 h0.7 r270
SIG4:
  pour cut-out: 37.1,55.1 37.1,51.1 35.55,51.1 35.55,55.1
  text "4" at 35.95,51.5 h0.7 r270
PLANE1 (plane layer: these items are gaps in the copper):
  pour cut-out: 19.422,64.095 ccw(c17.2,63.5) 19.422,62.905 18.5,62.905 18.5,64.095
  pour cut-out: 20.498,26.414 20.498,28.639 ccw(c20.273,28.639) 20.273,28.864 cw(c20.273,29.114) 20.023,29.114 20.023,30.689 cw(c20.273,30.689) 20.273,30.939 23.623,30.939 cw(c23.623,30.664) 23.898,30.664 23.903,26.819 cw(c23.273,26.819) 23.273,26.189 20.723,26.189 cw(c20.723,26.414)
  pour cut-out: 37.1,55.1 37.1,51.1 35.55,51.1 35.55,55.1
  pour cut-out: 12.9,47.6 15.5,47.6 15.5,48.6 12.9,48.6
  pour cut-out: 19.1,57.2 19.1,54.6 20.1,54.6 20.1,57.2
  pour cut-out: 27.9,50.3 25.3,50.3 25.3,49.3 27.9,49.3
  pour cut-out: 24.1,50.3 21.5,50.3 21.5,49.3 24.1,49.3
  pour cut-out: 19.1,53.4 19.1,50.8 20.1,50.8 20.1,53.4
  pour cut-out: 32.8,60.822 32.8,62.378 31.527,62.378 31.527,60.822
  pour cut-out: 26.8,60.822 26.8,62.378 25.527,62.378 25.527,60.822
  pour cut-out: 24.5,41.422 24.5,42.978 23.227,42.978 23.227,41.422
  pour cut-out: 16.55,33.65 15.45,32.55 16.35,31.65 17.45,32.75
  lines w0.2: 35.952,53.4 35.952,53.9 36.552,53.4 ; 36.552,53.9 36.65,53.851 36.65,53.449 ; 18.5,62.905 18.5,64.095 19.422,64.095 ccw(c17.2,63.5) 19.422,62.905 18.5,62.905

## Silkscreen, mask and mechanical layers (free items; w line width, h text height)
Top Overlay:
  drawing of 193 lines, arcs and shapes, not listed
Top Solder:
  rectangle: 35.6,51.15 37.1,55.1
  region: 34,60.7 34,62.6 31.6,62.6 31.6,60.7
  region: 28,60.7 28,62.6 25.6,62.6 25.6,60.7
  region: 25.7,41.3 25.7,43.2 23.3,43.2 23.3,41.3
Bottom Solder:
  rectangle: 35.6,51.15 37.1,55.1

## Text inside footprints (layer, text, board x,y; h text height)
CN3: Top Overlay "10" at 4.8,66.5 h0.7; Top Overlay "9" at 12.6,66.4 h0.7; Top Overlay "1" at 11.4,59.5 h0.7 r90; Top Overlay "2" at 5,60.6 h0.7
CN8: Bottom Overlay "1" at 34.808,24.712 h1.27 r90; Bottom Overlay "2" at 32.268,25.22 h1.27 r90; Bottom Overlay "5" at 34.93,10.84 h1.27 r90; Bottom Overlay "6" at 32.23,10.84 h1.27 r90
CN9: Bottom Overlay "6" at 32.23,23.54 h1.27 r90; Bottom Overlay "5" at 34.93,23.54 h1.27 r90; Bottom Overlay "2" at 32.268,37.92 h1.27 r90; Bottom Overlay "1" at 34.808,37.412 h1.27 r90
LED1: Assembly Top "A" at 35.628,7.768 h1.02; Assembly Top "K" at 37.864,7.768 h1.02